# EAGLE board front_board_print (EAGLE 7.1.0)
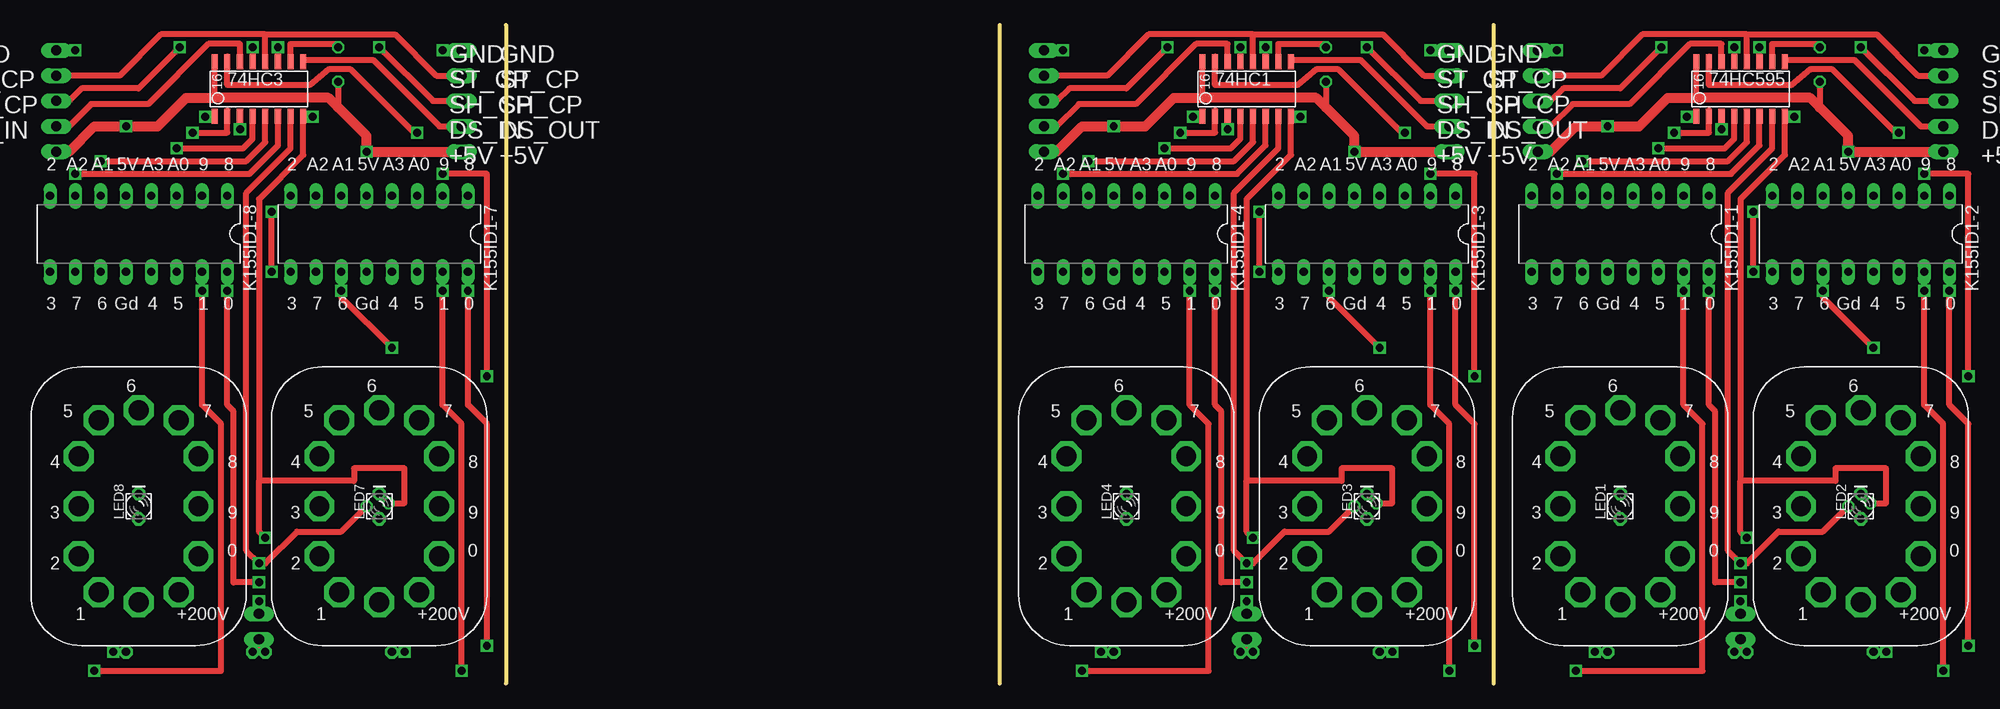
[diagram p0: board, top side]
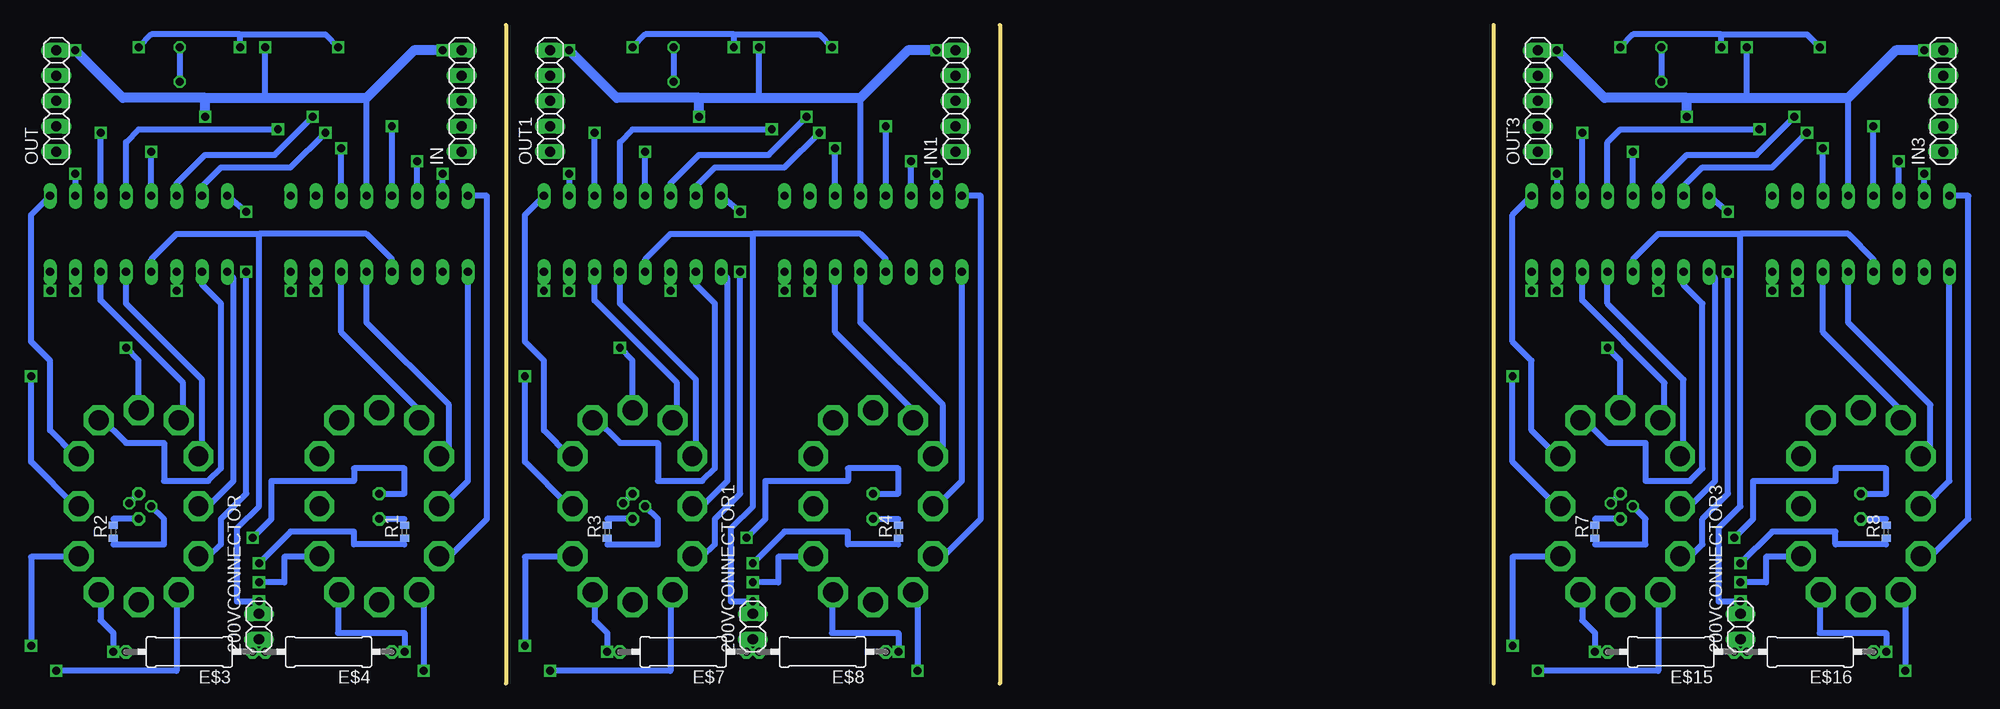
[diagram p1: board, bottom side, seen from below]

Size 99.06 x 66.04 mm. Coordinates in mm from the lower left corner, seen from the top.
Outline: 99.06,66.04 99.06,0
Outline: 49.53,66.04 49.53,0
Outline: 0,66.04 0,0
Copper layers (1*16): Top 0.035mm / dielectric 1.5mm / Bottom 0.035mm
Design rules "default": minimum track width 10mil, minimum drill 24mil, track to track 8mil, track to pad 8mil, pad to pad 8mil, via to via 8mil, smd to smd 8mil, copper to edge 40mil, drill to drill 8mil, minimum pad ring 10mil, minimum via ring 8mil, stop-mask expansion 4mil, vias tented up to drill 0mil, thermal gap 10mil

## Footprints (pad centres in the part's own frame; a part is rotated, then mirrored left to right if it is on the bottom)
SO-16 = smd 0.61 x 1.524: 1 -4.445,-2.794; 2 -3.175,-2.794; 3 -1.905,-2.794; 4 -0.635,-2.794; 5 0.635,-2.794; 6 1.905,-2.794; 7 3.175,-2.794; 8 4.445,-2.794; 9 4.445,2.667; 10 3.175,2.667; 11 1.905,2.667; 12 0.635,2.667; 13 -0.635,2.667; 14 -1.905,2.667; 15 -3.175,2.667; 16 -4.445,2.667
1X02 = drill 1.016 long: 1 -1.27,0; 2 1.27,0
IN-12 = drill 2 octagon: 0 6,-5; 1 -4,-8.635; 2 -6,-5; 3 -6,0; 4 -6,5; 5 -4,8.635; 6 0,9.635; 7 4,8.635; 8 6,5; 9 6,0; +200V 4,-8.635; P$10 0,-9.635
0309/12 = drill 0.813 octagon: 1 -6.35,0; 2 6.35,0
1X05 = drill 1.016 long: 1 -5.08,0; 2 -2.54,0; 3 0,0; 4 2.54,0; 5 5.08,0
K155ID1 = drill 0.813 long: 1 -8.89,-3.81; 2 -6.35,-3.81; 3 -3.81,-3.81; 4 -1.27,-3.81; 5 1.27,-3.81; 6 3.81,-3.81; 7 6.35,-3.81; 8 8.89,-3.81; 9 8.89,3.81; 10 6.35,3.81; 11 3.81,3.81; 12 1.27,3.81; 13 -1.27,3.81; 14 -3.81,3.81; 15 -6.35,3.81; 16 -8.89,3.81
LED_LD260 = drill 0.813 octagon: A -1.27,0; K 1.27,0
R0402 = smd 0.7 x 0.9: 1 -0.65,0; 2 0.65,0

## Placement (x,y rotation side)
74HC1  [SO-16]  74.3,59.69 0 top
74HC3  [SO-16]  -24.77,59.69 0 top  (outside the outline)
74HC595  [SO-16]  123.83,59.69 0 top  (outside the outline)
200VCONNECTOR  [1X02]  123.83,5.71 90 bottom  (outside the outline)
200VCONNECTOR1  [1X02]  74.3,5.71 90 bottom
200VCONNECTOR3  [1X02]  -24.77,5.71 90 bottom  (outside the outline)
E$1  [IN-12]  111.76,17.78 0 top  (outside the outline)
E$2  [IN-12]  135.89,17.78 0 top  (outside the outline)
E$3  [0309/12]  130.81,3.18 180 bottom  (outside the outline)
E$4  [0309/12]  116.84,3.18 180 bottom  (outside the outline)
E$5  [IN-12]  86.36,17.78 0 top
E$6  [IN-12]  62.23,17.78 0 top
E$7  [0309/12]  81.28,3.18 180 bottom
E$8  [0309/12]  67.31,3.18 180 bottom
E$13  [IN-12]  -12.7,17.78 0 top  (outside the outline)
E$14  [IN-12]  -36.83,17.78 0 top  (outside the outline)
E$15  [0309/12]  -17.78,3.18 180 bottom  (outside the outline)
E$16  [0309/12]  -31.75,3.18 180 bottom  (outside the outline)
IN  [1X05]  103.5,58.42 90 bottom  (outside the outline)
IN1  [1X05]  53.98,58.42 90 bottom
IN3  [1X05]  -45.08,58.42 90 bottom  (outside the outline)
K155ID1-1  [K155ID1]  111.76,45.09 180 top  (outside the outline)
K155ID1-2  [K155ID1]  135.89,45.09 180 top  (outside the outline)
K155ID1-3  [K155ID1]  86.36,45.09 180 top
K155ID1-4  [K155ID1]  62.23,45.09 180 top
K155ID1-7  [K155ID1]  -12.7,45.09 180 top  (outside the outline)
K155ID1-8  [K155ID1]  -36.83,45.09 180 top  (outside the outline)
LED1  [LED_LD260]  111.76,17.78 90 top  (outside the outline)
LED2  [LED_LD260]  135.89,17.78 90 top  (outside the outline)
LED3  [LED_LD260]  86.36,17.78 90 top
LED4  [LED_LD260]  62.23,17.78 90 top
LED7  [LED_LD260]  -12.7,17.78 90 top  (outside the outline)
LED8  [LED_LD260]  -36.83,17.78 90 top  (outside the outline)
OUT  [1X05]  144.15,58.42 90 bottom  (outside the outline)
OUT1  [1X05]  94.62,58.42 90 bottom
OUT3  [1X05]  -4.45,58.42 90 bottom  (outside the outline)
R1  [R0402]  109.22,15.24 90 bottom  (outside the outline)
R2  [R0402]  138.43,15.24 90 bottom  (outside the outline)
R3  [R0402]  88.9,15.24 90 bottom
R4  [R0402]  59.69,15.24 90 bottom
R7  [R0402]  -10.16,15.24 90 bottom  (outside the outline)
R8  [R0402]  -39.37,15.24 90 bottom  (outside the outline)

## Library data of the parts
74HC1 74HC3 74HC595 = texas
200VCONNECTOR 200VCONNECTOR1 200VCONNECTOR3 IN IN1 IN3 OUT OUT1 OUT3 = pinhead
E$1 E$2 E$5 E$6 E$13 E$14 K155ID1-1-K155ID1-4 K155ID1-7 K155ID1-8 = _ArSoron
E$3 E$4 E$7 E$8 E$15 E$16 = rcl
LED1-LED4 LED7 LED8 R1-R4 R7 R8 = eagle-ltspice

## Nets
+5V: IN.1 K155ID1-1.5 K155ID1-2.5 OUT.1
+5V1: IN1.1 K155ID1-3.5 K155ID1-4.5 OUT1.1
+5V3: IN3.1 K155ID1-7.5 K155ID1-8.5 OUT3.1
+200V: 200VCONNECTOR.1 E$3.1 E$4.2
+200V1: 200VCONNECTOR1.1 E$7.1 E$8.2
+200V3: 200VCONNECTOR3.1 E$15.1 E$16.2
DATA_IN: IN.2
DATA_IN1: IN1.2
DATA_IN3: IN3.2
DATA_OUT: OUT.2
DATA_OUT1: OUT1.2
DATA_OUT3: OUT3.2
GND_HIGH: K155ID1-1.12 K155ID1-2.12
GND_HIGH1: K155ID1-3.12 K155ID1-4.12
GND_HIGH3: K155ID1-7.12 K155ID1-8.12
GND_LOW: IN.5 K155ID1-1.4 LED1.K LED2.K
GND_LOW1: IN1.5 K155ID1-4.4 LED3.K LED4.K
GND_LOW3: IN3.5 K155ID1-8.4 LED7.K LED8.K
S$1: K155ID1-2.1
S$2: K155ID1-2.2
S$3: K155ID1-2.16
S$4: K155ID1-2.9
S$5: K155ID1-2.8
S$6: K155ID1-2.13
S$7: K155ID1-2.14
S$8: K155ID1-2.10
S$9: K155ID1-1.7
S$10: K155ID1-2.11
S$11: LED2.A
S$12: K155ID1-2.15
S$14: K155ID1-1.16
S$15: K155ID1-1.9
S$16: K155ID1-1.8
S$17: K155ID1-1.13
S$18: K155ID1-1.14
S$19: LED1.A
S$20: K155ID1-1.6
S$21: K155ID1-1.3
S$22: K155ID1-1.15
S$23: K155ID1-2.3
S$24: K155ID1-2.4
S$25: K155ID1-2.7
S$26: K155ID1-2.6
S$27: K155ID1-3.1
S$28: K155ID1-3.2
S$29: K155ID1-3.16
S$30: K155ID1-3.9
S$31: K155ID1-3.8
S$32: K155ID1-3.13
S$33: K155ID1-3.14
S$34: K155ID1-3.10
S$35: K155ID1-3.11
S$37: K155ID1-3.15
S$38: LED3.A
S$39: K155ID1-4.16
S$40: K155ID1-4.9
S$41: K155ID1-4.8
S$42: K155ID1-4.13
S$43: K155ID1-4.14
S$44: K155ID1-4.15
S$45: LED4.A
S$46: K155ID1-4.7
S$47: K155ID1-4.6
S$48: K155ID1-4.3
S$49: K155ID1-3.4
S$50: K155ID1-3.7
S$51: K155ID1-3.6
S$52: K155ID1-3.3
S$79: K155ID1-7.1
S$80: K155ID1-7.2
S$81: K155ID1-7.16
S$82: K155ID1-7.9
S$83: K155ID1-7.8
S$84: K155ID1-7.13
S$85: K155ID1-7.14
S$86: K155ID1-7.10
S$87: K155ID1-7.11
S$89: K155ID1-7.15
S$90: LED7.A
S$91: K155ID1-8.16
S$92: K155ID1-8.9
S$93: K155ID1-8.8
S$94: K155ID1-8.13
S$95: K155ID1-8.14
S$96: K155ID1-8.15
S$97: LED8.A
S$98: K155ID1-8.7
S$99: K155ID1-8.6
S$100: K155ID1-8.3
S$101: K155ID1-7.4
S$102: K155ID1-7.7
S$103: K155ID1-7.6
S$104: K155ID1-7.3
SH_CP: IN.3 OUT.3
SH_CP1: IN1.3 OUT1.3
SH_CP3: IN3.3 OUT3.3
ST_CP: IN.4 OUT.4
ST_CP1: IN1.4 OUT1.4
ST_CP3: IN3.4 OUT3.4

## Tracks (layer width: path | path; a pad name or v marks a point on that pad's centre or on a via)
+5V  (via drill 0.8)
  Top 0.61: 119.38,58.74 119.38,62.55 | 127,61.91 127,64.14 131.44,64.14 v131.76,63.82 | v131.76,60.33 131.76,57.78
  Top 1.016: IN.1 104.78,53.34 107.31,55.88 v110.49,55.88 113.67,55.88 116.52,58.74 119.38,58.74 130.81,58.74 131.76,57.78 134.62,54.93 v134.62,53.34 OUT.1
  Bottom 0.61: K155ID1-1.5 v110.49,55.88 | K155ID1-2.5 v134.62,53.34 | v131.76,63.82 v131.76,60.33
+5V1  (via drill 0.8)
  Top 0.61: 69.85,58.74 69.85,62.55 | 77.47,61.91 77.47,64.14 81.92,64.14 v82.23,63.82 | v82.23,60.33 82.23,57.78
  Top 1.016: IN1.1 55.25,53.34 57.78,55.88 v60.96,55.88 64.14,55.88 66.99,58.74 69.85,58.74 81.28,58.74 82.23,57.78 85.09,54.93 v85.09,53.34 OUT1.1
  Bottom 0.61: K155ID1-4.5 v60.96,55.88 | K155ID1-3.5 v85.09,53.34 | v82.23,63.82 v82.23,60.33
+5V3  (via drill 0.8)
  Top 0.61: -29.21,58.74 -29.21,62.55 | -21.59,61.91 -21.59,64.14 -17.14,64.14 v-16.83,63.82 | v-16.83,60.33 -16.83,57.78
  Top 1.016: IN3.1 -43.81,53.34 -41.27,55.88 v-38.1,55.88 -34.92,55.88 -32.07,58.74 -29.21,58.74 -17.78,58.74 -16.83,57.78 -13.97,54.93 v-13.97,53.34 OUT3.1
  Bottom 0.61: K155ID1-8.5 v-38.1,55.88 | K155ID1-7.5 v-13.97,53.34 | v-16.83,63.82 v-16.83,60.33
+200V
  Top 0.61: E$3.1 123.83,3.18 | 123.83,3.18 E$4.2 | 123.83,3.18 200VCONNECTOR.1
+200V1
  Top 0.61: E$7.1 74.3,3.18 | 74.3,3.18 E$8.2 | 74.3,3.18 200VCONNECTOR1.1
+200V3
  Top 0.61: E$15.1 -24.77,3.18 | -24.77,3.18 E$16.2 | -24.77,3.18 200VCONNECTOR3.1
+200V_LEFT  (via drill 0.8)
  Top 0.61: v109.22,3.18 110.49,3.18
  Bottom 0.61: 115.89,9.21 115.89,5.08 109.22,5.08 v109.22,3.18
+200V_LEFT1  (via drill 0.8)
  Top 0.61: v59.69,3.18 60.96,3.18
  Bottom 0.61: 66.36,9.21 66.36,5.08 59.69,5.08 v59.69,3.18
+200V_LEFT3  (via drill 0.8)
  Top 0.61: v-39.37,3.18 -38.1,3.18
  Bottom 0.61: -32.7,9.21 -32.7,5.08 -39.37,5.08 v-39.37,3.18
+200V_RIGHT  (via drill 0.8)
  Top 0.61: v138.43,3.18 137.16,3.18
  Bottom 0.61: 139.7,8.89 139.7,6.35 138.43,5.08 v138.43,3.18
+200V_RIGHT1  (via drill 0.8)
  Top 0.61: v88.9,3.18 87.63,3.18
  Bottom 0.61: 90.17,8.89 90.17,6.35 88.9,5.08 v88.9,3.18
+200V_RIGHT3  (via drill 0.8)
  Top 0.61: v-10.16,3.18 -11.43,3.18
  Bottom 0.61: -8.89,8.89 -8.89,6.35 -10.16,5.08 v-10.16,3.18
DATA_IN
  Top 0.61: 121.92,62.23 121.92,64.14 118.75,64.14 112.71,58.1 107,58.1 104.78,55.88 IN.2
DATA_IN1
  Top 0.61: 72.39,62.23 72.39,64.14 69.22,64.14 63.18,58.1 57.47,58.1 55.25,55.88 IN1.2
DATA_IN3
  Top 0.61: -26.67,62.23 -26.67,64.14 -29.84,64.14 -35.88,58.1 -41.59,58.1 -43.81,55.88 IN3.2
DATA_OUT
  Top 0.61: 128.27,62.55 135.25,62.55 141.92,55.88 OUT.2
DATA_OUT1
  Top 0.61: 78.74,62.55 85.72,62.55 92.39,55.88 OUT1.2
DATA_OUT3
  Top 0.61: -20.32,62.55 -13.33,62.55 -6.67,55.88 OUT3.2
GND_HIGH  (via drill 0.8)
  Top 0.61: v123.83,8.25 123.83,6.98
  Bottom 0.61: K155ID1-2.12 134.62,42.55 132.08,45.09 123.83,45.09 | 123.83,45.09 123.83,17.78 126.05,15.56 126.05,8.25 v123.83,8.25 | K155ID1-1.12 110.49,42.55 113.03,45.09 123.83,45.09
GND_HIGH1  (via drill 0.8)
  Top 0.61: v74.3,8.25 74.3,6.98
  Bottom 0.61: K155ID1-3.12 85.09,42.55 82.55,45.09 74.3,45.09 | 74.3,45.09 74.3,17.78 76.52,15.56 76.52,8.25 v74.3,8.25 | K155ID1-4.12 60.96,42.55 63.5,45.09 74.3,45.09
GND_HIGH3  (via drill 0.8)
  Top 0.61: v-24.77,8.25 -24.77,6.98
  Bottom 0.61: K155ID1-7.12 -13.97,42.55 -16.51,45.09 -24.77,45.09 | -24.77,45.09 -24.77,17.78 -22.54,15.56 -22.54,8.25 v-24.77,8.25 | K155ID1-8.12 -38.1,42.55 -35.56,45.09 -24.77,45.09
GND_LOW  (via drill 0.8)
  Top 0.61: v129.22,56.83 128.27,56.83 128.27,53.02 123.83,48.58 123.83,20.32 | v123.19,63.82 123.19,61.91 | v136.84,18.1 138.43,18.1 138.43,21.59 133.35,21.59 133.35,20.32 123.83,20.32 | v124.46,14.61 123.83,15.24 123.83,20.32
  Top 1.016: v142.24,63.5 144.15,63.5 | v105.41,63.5 IN.5
  Bottom 0.61: 123.19,58.74 v123.19,63.82 | LED2.K v136.84,18.1 | v124.46,14.61 122.56,16.51 122.56,20.32 114.3,20.32 114.3,21.59 109.22,21.59 109.22,19.05 LED1.K | K155ID1-1.4 113.03,58.74
  Bottom 1.016: v142.24,63.5 137.48,58.74 129.22,58.74 | v129.22,56.83 129.22,58.74 | 129.22,58.74 123.19,58.74 113.03,58.74 108.27,63.5 v105.41,63.5
GND_LOW1  (via drill 0.8)
  Top 0.61: v79.69,56.83 78.74,56.83 78.74,53.02 74.3,48.58 74.3,20.32 | v73.66,63.82 73.66,61.91 | v87.31,18.1 88.9,18.1 88.9,21.59 83.82,21.59 83.82,20.32 74.3,20.32 | v74.93,14.61 74.3,15.24 74.3,20.32
  Top 1.016: v92.71,63.5 94.62,63.5 | v55.88,63.5 IN1.5
  Bottom 0.61: 73.66,58.74 v73.66,63.82 | LED3.K v87.31,18.1 | v74.93,14.61 73.03,16.51 73.03,20.32 64.77,20.32 64.77,21.59 59.69,21.59 59.69,19.05 LED4.K | K155ID1-4.4 63.5,58.74
  Bottom 1.016: v92.71,63.5 87.95,58.74 79.69,58.74 | v79.69,56.83 79.69,58.74 | 79.69,58.74 73.66,58.74 63.5,58.74 58.74,63.5 v55.88,63.5
GND_LOW3  (via drill 0.8)
  Top 0.61: v-19.37,56.83 -20.32,56.83 -20.32,53.02 -24.77,48.58 -24.77,20.32 | v-25.4,63.82 -25.4,61.91 | v-11.75,18.1 -10.16,18.1 -10.16,21.59 -15.24,21.59 -15.24,20.32 -24.77,20.32 | v-24.13,14.61 -24.77,15.24 -24.77,20.32
  Top 1.016: v-6.35,63.5 -4.45,63.5 | v-43.18,63.5 IN3.5
  Bottom 0.61: -25.4,58.74 v-25.4,63.82 | LED7.K v-11.75,18.1 | v-24.13,14.61 -26.04,16.51 -26.04,20.32 -34.29,20.32 -34.29,21.59 -39.37,21.59 -39.37,19.05 LED8.K | K155ID1-8.4 -35.56,58.74
  Bottom 1.016: v-6.35,63.5 -11.11,58.74 -19.37,58.74 | v-19.37,56.83 -19.37,58.74 | -19.37,58.74 -25.4,58.74 -35.56,58.74 -40.32,63.5 v-43.18,63.5
LED+  (via drill 0.8)
  Top 0.61: v134.62,17.78 132.08,15.24 127.64,15.24 124.46,12.07 v123.83,12.07 122.56,13.34 122.56,49.21 127,53.66 127,56.52
  Bottom 0.61: 109.22,13.97 114.3,13.97 114.3,15.24 120.65,15.24 v123.83,12.07 | v134.62,17.78 133.35,16.51 133.35,13.97 138.43,13.97
LED+1  (via drill 0.8)
  Top 0.61: v85.09,17.78 82.55,15.24 78.11,15.24 74.93,12.07 v74.3,12.07 73.03,13.34 73.03,49.21 77.47,53.66 77.47,56.52
  Bottom 0.61: 59.69,13.97 64.77,13.97 64.77,15.24 71.12,15.24 v74.3,12.07 | v85.09,17.78 83.82,16.51 83.82,13.97 88.9,13.97
LED+3  (via drill 0.8)
  Top 0.61: v-13.97,17.78 -16.51,15.24 -20.95,15.24 -24.13,12.07 v-24.77,12.07 -26.04,13.34 -26.04,49.21 -21.59,53.66 -21.59,56.52
  Bottom 0.61: -39.37,13.97 -34.29,13.97 -34.29,15.24 -27.94,15.24 v-24.77,12.07 | v-13.97,17.78 -15.24,16.51 -15.24,13.97 -10.16,13.97
S$1
  Bottom 0.61: 142.24,22.86 144.78,25.4 144.78,32.38 146.69,34.29 146.69,46.99 K155ID1-2.1
S$2  (via drill 0.8)
  Top 0.61: v146.69,30.8 146.69,51.12 v142.24,51.12
  Bottom 0.61: 142.24,17.78 146.69,22.23 v146.69,30.8 | v142.24,51.12 K155ID1-2.2
S$3  (via drill 0.8)
  Top 0.61: v146.69,3.81 146.69,26.04 144.78,27.94 v144.78,39.37
  Bottom 0.61: 142.24,12.7 146.69,12.7 v146.69,3.81 | v144.78,39.37 K155ID1-2.16
S$4
  Bottom 0.61: 129.54,17.78 128.91,17.78 126.37,20.32 126.37,40.64 K155ID1-2.9
S$5  (via drill 0.8)
  Top 0.61: v125.09,41.27 v125.09,47.31
  Bottom 0.61: 129.54,12.7 128.91,12.7 127.64,13.97 127.64,16.51 125.09,19.05 v125.09,41.27 | v125.09,47.31 K155ID1-2.8
S$6
  Bottom 0.61: 129.54,22.86 129.54,30.48 137.16,38.1 K155ID1-2.13
S$7
  Bottom 0.61: 132.08,26.67 131.44,27.3 131.44,30.16 139.7,38.42 K155ID1-2.14
S$8
  Bottom 0.61: 139.7,26.67 137.16,24.13 133.35,24.13 133.35,20.32 128.91,20.32 127.64,21.59 127.64,38.1 129.54,40.01 K155ID1-2.10
S$9  (via drill 0.8)
  Top 0.61: v105.41,51.12 122.87,51.12 125.73,53.98 125.73,57.15
  Bottom 0.61: K155ID1-1.7 v105.41,51.12
S$10  (via drill 0.8)
  Top 0.61: v137.16,33.66 132.08,38.73 v132.08,39.37
  Bottom 0.61: 135.89,27.94 135.89,32.38 v137.16,33.66 | v132.08,39.37 K155ID1-2.11
S$11
  Bottom 0.61: LED2.A 138.43,16.51
S$12  (via drill 0.8)
  Top 0.61: 144.15,1.27 144.15,26.04 142.24,27.94 v142.24,39.37
  Bottom 0.61: v142.24,39.37 K155ID1-2.15
S$13  (via drill 0.8)
  Bottom 0.61: 132.08,8.89 132.08,1.27 v144.15,1.27
S$14  (via drill 0.8)
  Top 0.61: v123.83,10.16 121.28,10.16 121.28,27.3 120.65,27.94 v120.65,39.37
  Bottom 0.61: 118.11,12.7 121.28,12.7 121.28,10.16 v123.83,10.16 | v120.65,39.37 K155ID1-1.16
S$15
  Bottom 0.61: 105.41,17.78 102.87,20.32 K155ID1-1.9
S$16
  Bottom 0.61: 105.41,12.7 104.78,12.7 100.97,16.51 100.97,48.89 K155ID1-1.8
S$17
  Bottom 0.61: 105.41,22.86 104.78,23.5 104.78,27.94 113.03,36.2 K155ID1-1.13
S$18
  Bottom 0.61: 107.95,26.67 107.95,27.62 115.57,35.24 K155ID1-1.14
S$19
  Bottom 0.61: LED1.A 109.22,16.51
S$20  (via drill 0.8)
  Top 0.61: v107.95,52.39 122.56,52.39 124.46,54.29 124.46,57.15
  Bottom 0.61: K155ID1-1.6 v107.95,52.39
S$21  (via drill 0.8)
  Top 0.61: v115.57,53.66 122.24,53.66 123.19,54.61 123.19,57.15
  Bottom 0.61: K155ID1-1.3 v115.57,53.66
S$22  (via drill 0.8)
  Top 0.61: v107.31,1.27 120.02,1.27 120.02,26.04 118.11,27.94 v118.11,39.37
  Bottom 0.61: v118.11,39.37 K155ID1-1.15 | 107.31,8.89 v107.31,1.27
S$23  (via drill 0.8)
  Top 0.61: v139.7,55.25 139.38,55.25 133.03,61.59 130.81,61.59 128.91,60.01 120.65,60.01 120.65,62.86
  Bottom 0.61: K155ID1-2.3 v139.7,55.25
S$24  (via drill 0.8)
  Top 0.61: v121.92,55.56 121.92,57.15
  Bottom 0.61: K155ID1-2.4 137.16,54.29 135.89,55.56 v121.92,55.56
S$25  (via drill 0.8)
  Top 0.61: v117.16,55.25 120.65,55.25 120.65,57.47
  Bottom 0.61: K155ID1-2.7 129.54,49.85 127.64,51.75 120.65,51.75 v117.16,55.25
S$26  (via drill 0.8)
  Top 0.61: v118.43,56.83 119.38,56.83
  Bottom 0.61: K155ID1-2.6 132.08,50.16 129.22,53.02 122.24,53.02 v118.43,56.83
S$27
  Bottom 0.61: 92.71,22.86 95.25,25.4 95.25,32.38 97.16,34.29 97.16,46.99 K155ID1-3.1
S$28  (via drill 0.8)
  Top 0.61: v97.16,30.8 97.16,51.12 v92.71,51.12
  Bottom 0.61: 92.71,17.78 97.16,22.23 v97.16,30.8 | v92.71,51.12 K155ID1-3.2
S$29  (via drill 0.8)
  Top 0.61: v97.16,3.81 97.16,26.04 95.25,27.94 v95.25,39.37
  Bottom 0.61: 92.71,12.7 97.16,12.7 v97.16,3.81 | v95.25,39.37 K155ID1-3.16
S$30
  Bottom 0.61: 80.01,17.78 79.38,17.78 76.84,20.32 76.84,40.64 K155ID1-3.9
S$31  (via drill 0.8)
  Top 0.61: v75.56,41.27 v75.56,47.31
  Bottom 0.61: 80.01,12.7 79.38,12.7 78.11,13.97 78.11,16.51 75.56,19.05 v75.56,41.27 | v75.56,47.31 K155ID1-3.8
S$32
  Bottom 0.61: 80.01,22.86 80.01,30.48 87.63,38.1 K155ID1-3.13
S$33
  Bottom 0.61: 82.55,26.67 81.92,27.3 81.92,30.16 90.17,38.42 K155ID1-3.14
S$34
  Bottom 0.61: 90.17,26.67 87.63,24.13 83.82,24.13 83.82,20.32 79.38,20.32 78.11,21.59 78.11,38.1 80.01,40.01 K155ID1-3.10
S$35  (via drill 0.8)
  Top 0.61: v87.63,33.66 82.55,38.73 v82.55,39.37
  Bottom 0.61: 86.36,27.94 86.36,32.38 v87.63,33.66 | v82.55,39.37 K155ID1-3.11
S$36  (via drill 0.8)
  Bottom 0.61: 82.55,8.89 82.55,1.27 v94.62,1.27
S$37  (via drill 0.8)
  Top 0.61: 94.62,1.27 94.62,26.04 92.71,27.94 v92.71,39.37
  Bottom 0.61: v92.71,39.37 K155ID1-3.15
S$38
  Bottom 0.61: LED3.A 88.9,16.51
S$39  (via drill 0.8)
  Top 0.61: v74.3,10.16 71.75,10.16 71.75,27.3 71.12,27.94 v71.12,39.37
  Bottom 0.61: 68.58,12.7 71.75,12.7 71.75,10.16 v74.3,10.16 | v71.12,39.37 K155ID1-4.16
S$40
  Bottom 0.61: 55.88,17.78 53.34,20.32 K155ID1-4.9
S$41
  Bottom 0.61: 55.88,12.7 55.25,12.7 51.44,16.51 51.44,48.89 K155ID1-4.8
S$42
  Bottom 0.61: 55.88,22.86 55.25,23.5 55.25,27.94 63.5,36.2 K155ID1-4.13
S$43
  Bottom 0.61: 58.42,26.67 58.42,27.62 66.04,35.24 K155ID1-4.14
S$44  (via drill 0.8)
  Top 0.61: v57.78,1.27 70.48,1.27 70.48,26.04 68.58,27.94 v68.58,39.37
  Bottom 0.61: v68.58,39.37 K155ID1-4.15 | 57.78,8.89 v57.78,1.27
S$45
  Bottom 0.61: LED4.A 59.69,16.51
S$46  (via drill 0.8)
  Top 0.61: v55.88,51.12 73.34,51.12 76.2,53.98 76.2,57.15
  Bottom 0.61: K155ID1-4.7 v55.88,51.12
S$47  (via drill 0.8)
  Top 0.61: v58.42,52.39 73.03,52.39 74.93,54.29 74.93,57.15
  Bottom 0.61: K155ID1-4.6 v58.42,52.39
S$48  (via drill 0.8)
  Top 0.61: v66.04,53.66 72.71,53.66 73.66,54.61 73.66,57.15
  Bottom 0.61: K155ID1-4.3 v66.04,53.66
S$49  (via drill 0.8)
  Top 0.61: v72.39,55.56 72.39,57.15
  Bottom 0.61: K155ID1-3.4 87.63,54.29 86.36,55.56 v72.39,55.56
S$50  (via drill 0.8)
  Top 0.61: v67.63,55.25 71.12,55.25 71.12,57.47
  Bottom 0.61: K155ID1-3.7 80.01,49.85 78.11,51.75 71.12,51.75 v67.63,55.25
S$51  (via drill 0.8)
  Top 0.61: v68.9,56.83 69.85,56.83
  Bottom 0.61: K155ID1-3.6 82.55,50.16 79.69,53.02 72.71,53.02 v68.9,56.83
S$52  (via drill 0.8)
  Top 0.61: v90.17,55.25 89.85,55.25 83.5,61.59 81.28,61.59 79.38,60.01 71.12,60.01 71.12,62.86
  Bottom 0.61: K155ID1-3.3 v90.17,55.25
S$79
  Bottom 0.61: -6.35,22.86 -3.81,25.4 -3.81,32.38 -1.91,34.29 -1.91,46.99 K155ID1-7.1
S$80  (via drill 0.8)
  Top 0.61: v-1.91,30.8 -1.91,51.12 v-6.35,51.12
  Bottom 0.61: -6.35,17.78 -1.91,22.23 v-1.91,30.8 | v-6.35,51.12 K155ID1-7.2
S$81  (via drill 0.8)
  Top 0.61: v-1.91,3.81 -1.91,26.04 -3.81,27.94 v-3.81,39.37
  Bottom 0.61: -6.35,12.7 -1.91,12.7 v-1.91,3.81 | v-3.81,39.37 K155ID1-7.16
S$82
  Bottom 0.61: -19.05,17.78 -19.68,17.78 -22.23,20.32 -22.23,40.64 K155ID1-7.9
S$83  (via drill 0.8)
  Top 0.61: v-23.49,41.27 v-23.49,47.31
  Bottom 0.61: -19.05,12.7 -19.68,12.7 -20.95,13.97 -20.95,16.51 -23.49,19.05 v-23.49,41.27 | v-23.49,47.31 K155ID1-7.8
S$84
  Bottom 0.61: -19.05,22.86 -19.05,30.48 -11.43,38.1 K155ID1-7.13
S$85
  Bottom 0.61: -16.51,26.67 -17.14,27.3 -17.14,30.16 -8.89,38.42 K155ID1-7.14
S$86
  Bottom 0.61: -8.89,26.67 -11.43,24.13 -15.24,24.13 -15.24,20.32 -19.68,20.32 -20.95,21.59 -20.95,38.1 -19.05,40.01 K155ID1-7.10
S$87  (via drill 0.8)
  Top 0.61: v-11.43,33.66 -16.51,38.73 v-16.51,39.37
  Bottom 0.61: -12.7,27.94 -12.7,32.38 v-11.43,33.66 | v-16.51,39.37 K155ID1-7.11
S$88  (via drill 0.8)
  Bottom 0.61: -16.51,8.89 -16.51,1.27 v-4.45,1.27
S$89  (via drill 0.8)
  Top 0.61: -4.45,1.27 -4.45,26.04 -6.35,27.94 v-6.35,39.37
  Bottom 0.61: v-6.35,39.37 K155ID1-7.15
S$90
  Bottom 0.61: LED7.A -10.16,16.51
S$91  (via drill 0.8)
  Top 0.61: v-24.77,10.16 -27.3,10.16 -27.3,27.3 -27.94,27.94 v-27.94,39.37
  Bottom 0.61: -30.48,12.7 -27.3,12.7 -27.3,10.16 v-24.77,10.16 | v-27.94,39.37 K155ID1-8.16
S$92
  Bottom 0.61: -43.18,17.78 -45.72,20.32 K155ID1-8.9
S$93
  Bottom 0.61: -43.18,12.7 -43.81,12.7 -47.62,16.51 -47.62,48.89 K155ID1-8.8
S$94
  Bottom 0.61: -43.18,22.86 -43.81,23.5 -43.81,27.94 -35.56,36.2 K155ID1-8.13
S$95
  Bottom 0.61: -40.64,26.67 -40.64,27.62 -33.02,35.24 K155ID1-8.14
S$96  (via drill 0.8)
  Top 0.61: v-41.27,1.27 -28.58,1.27 -28.58,26.04 -30.48,27.94 v-30.48,39.37
  Bottom 0.61: v-30.48,39.37 K155ID1-8.15 | -41.27,8.89 v-41.27,1.27
S$97
  Bottom 0.61: LED8.A -39.37,16.51
S$98  (via drill 0.8)
  Top 0.61: v-43.18,51.12 -25.72,51.12 -22.86,53.98 -22.86,57.15
  Bottom 0.61: K155ID1-8.7 v-43.18,51.12
S$99  (via drill 0.8)
  Top 0.61: v-40.64,52.39 -26.04,52.39 -24.13,54.29 -24.13,57.15
  Bottom 0.61: K155ID1-8.6 v-40.64,52.39
S$100  (via drill 0.8)
  Top 0.61: v-33.02,53.66 -26.35,53.66 -25.4,54.61 -25.4,57.15
  Bottom 0.61: K155ID1-8.3 v-33.02,53.66
S$101  (via drill 0.8)
  Top 0.61: v-26.67,55.56 -26.67,57.15
  Bottom 0.61: K155ID1-7.4 -11.43,54.29 -12.7,55.56 v-26.67,55.56
S$102  (via drill 0.8)
  Top 0.61: v-31.43,55.25 -27.94,55.25 -27.94,57.47
  Bottom 0.61: K155ID1-7.7 -19.05,49.85 -20.95,51.75 -27.94,51.75 v-31.43,55.25
S$103  (via drill 0.8)
  Top 0.61: v-30.16,56.83 -29.21,56.83
  Bottom 0.61: K155ID1-7.6 -16.51,50.16 -19.37,53.02 -26.35,53.02 v-30.16,56.83
S$104  (via drill 0.8)
  Top 0.61: v-8.89,55.25 -9.21,55.25 -15.56,61.59 -17.78,61.59 -19.68,60.01 -27.94,60.01 -27.94,62.86
  Bottom 0.61: K155ID1-7.3 v-8.89,55.25
SH_CP  (via drill 0.8)
  Top 0.61: 125.73,61.91 v125.73,63.82 | v135.89,63.82 141.29,58.42 OUT.3 | v115.89,63.82 111.76,59.69 106.05,59.69 104.78,58.42 IN.3
  Bottom 0.61: v125.73,63.82 125.73,65.09 | 125.73,65.09 134.62,65.09 v135.89,63.82 | 125.73,65.09 117.16,65.09 v115.89,63.82
SH_CP1  (via drill 0.8)
  Top 0.61: 76.2,61.91 v76.2,63.82 | v86.36,63.82 91.76,58.42 OUT1.3 | v66.36,63.82 62.23,59.69 56.52,59.69 55.25,58.42 IN1.3
  Bottom 0.61: v76.2,63.82 76.2,65.09 | 76.2,65.09 85.09,65.09 v86.36,63.82 | 76.2,65.09 67.63,65.09 v66.36,63.82
SH_CP3  (via drill 0.8)
  Top 0.61: -22.86,61.91 v-22.86,63.82 | v-12.7,63.82 -7.3,58.42 OUT3.3 | v-32.7,63.82 -36.83,59.69 -42.55,59.69 -43.81,58.42 IN3.3
  Bottom 0.61: v-22.86,63.82 -22.86,65.09 | -22.86,65.09 -13.97,65.09 v-12.7,63.82 | -22.86,65.09 -31.43,65.09 v-32.7,63.82
ST_CP
  Top 0.61: 124.46,61.91 124.46,65.09 | 124.46,65.09 137.48,65.09 141.61,60.96 OUT.4 | 124.46,65.09 113.98,65.09 109.86,60.96 IN.4
ST_CP1
  Top 0.61: 74.93,61.91 74.93,65.09 | 74.93,65.09 87.95,65.09 92.08,60.96 OUT1.4 | 74.93,65.09 64.45,65.09 60.33,60.96 IN1.4
ST_CP3
  Top 0.61: -24.13,61.91 -24.13,65.09 | -24.13,65.09 -11.11,65.09 -6.98,60.96 OUT3.4 | -24.13,65.09 -34.61,65.09 -38.73,60.96 IN3.4

## Text on the board
tNames: GND | GND | GND | GND | GND | GND | ST_CP | ST_CP | ST_CP | ST_CP | ST_CP | ST_CP | SH_CP | SH_CP | SH_CP | SH_CP | SH_CP | SH_CP | DS_IN | DS_IN | DS_OUT | DS_IN | DS_OUT | DS_OUT | +5V | +5V | +5V | +5V | +5V | +5V